# Altium PCB PCB1.PcbDoc
Units mm, origin at the board's own origin, x right, y up, seen from the top; angles counter-clockwise.
Board outline 48.75 x 42.5 mm, 2 copper layers (Top Layer, Bottom Layer), stack 0.325 mm thick; 24 components, 30 nets, 95 pads, 14 vias.
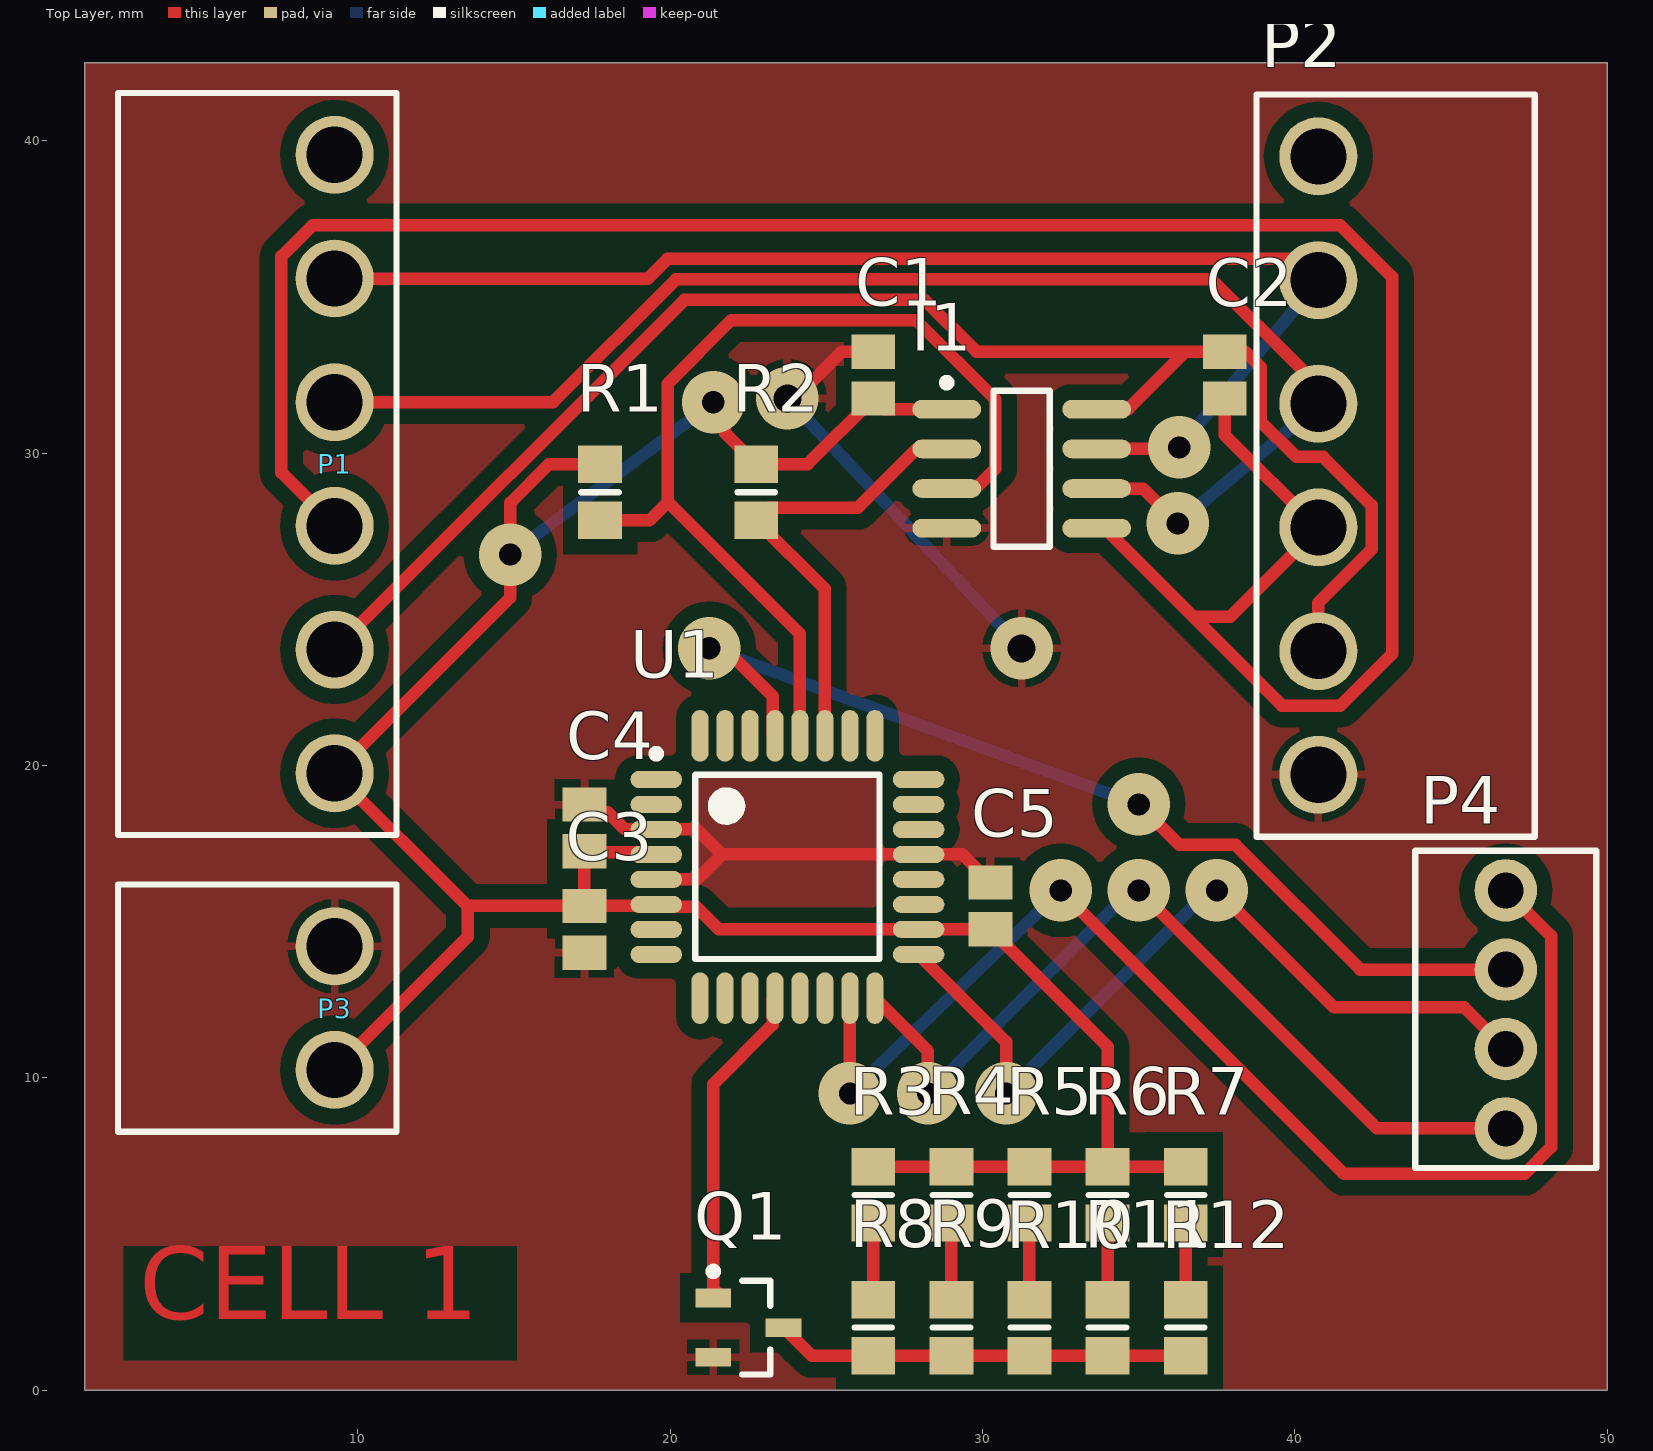
[diagram p0: Top Layer view]
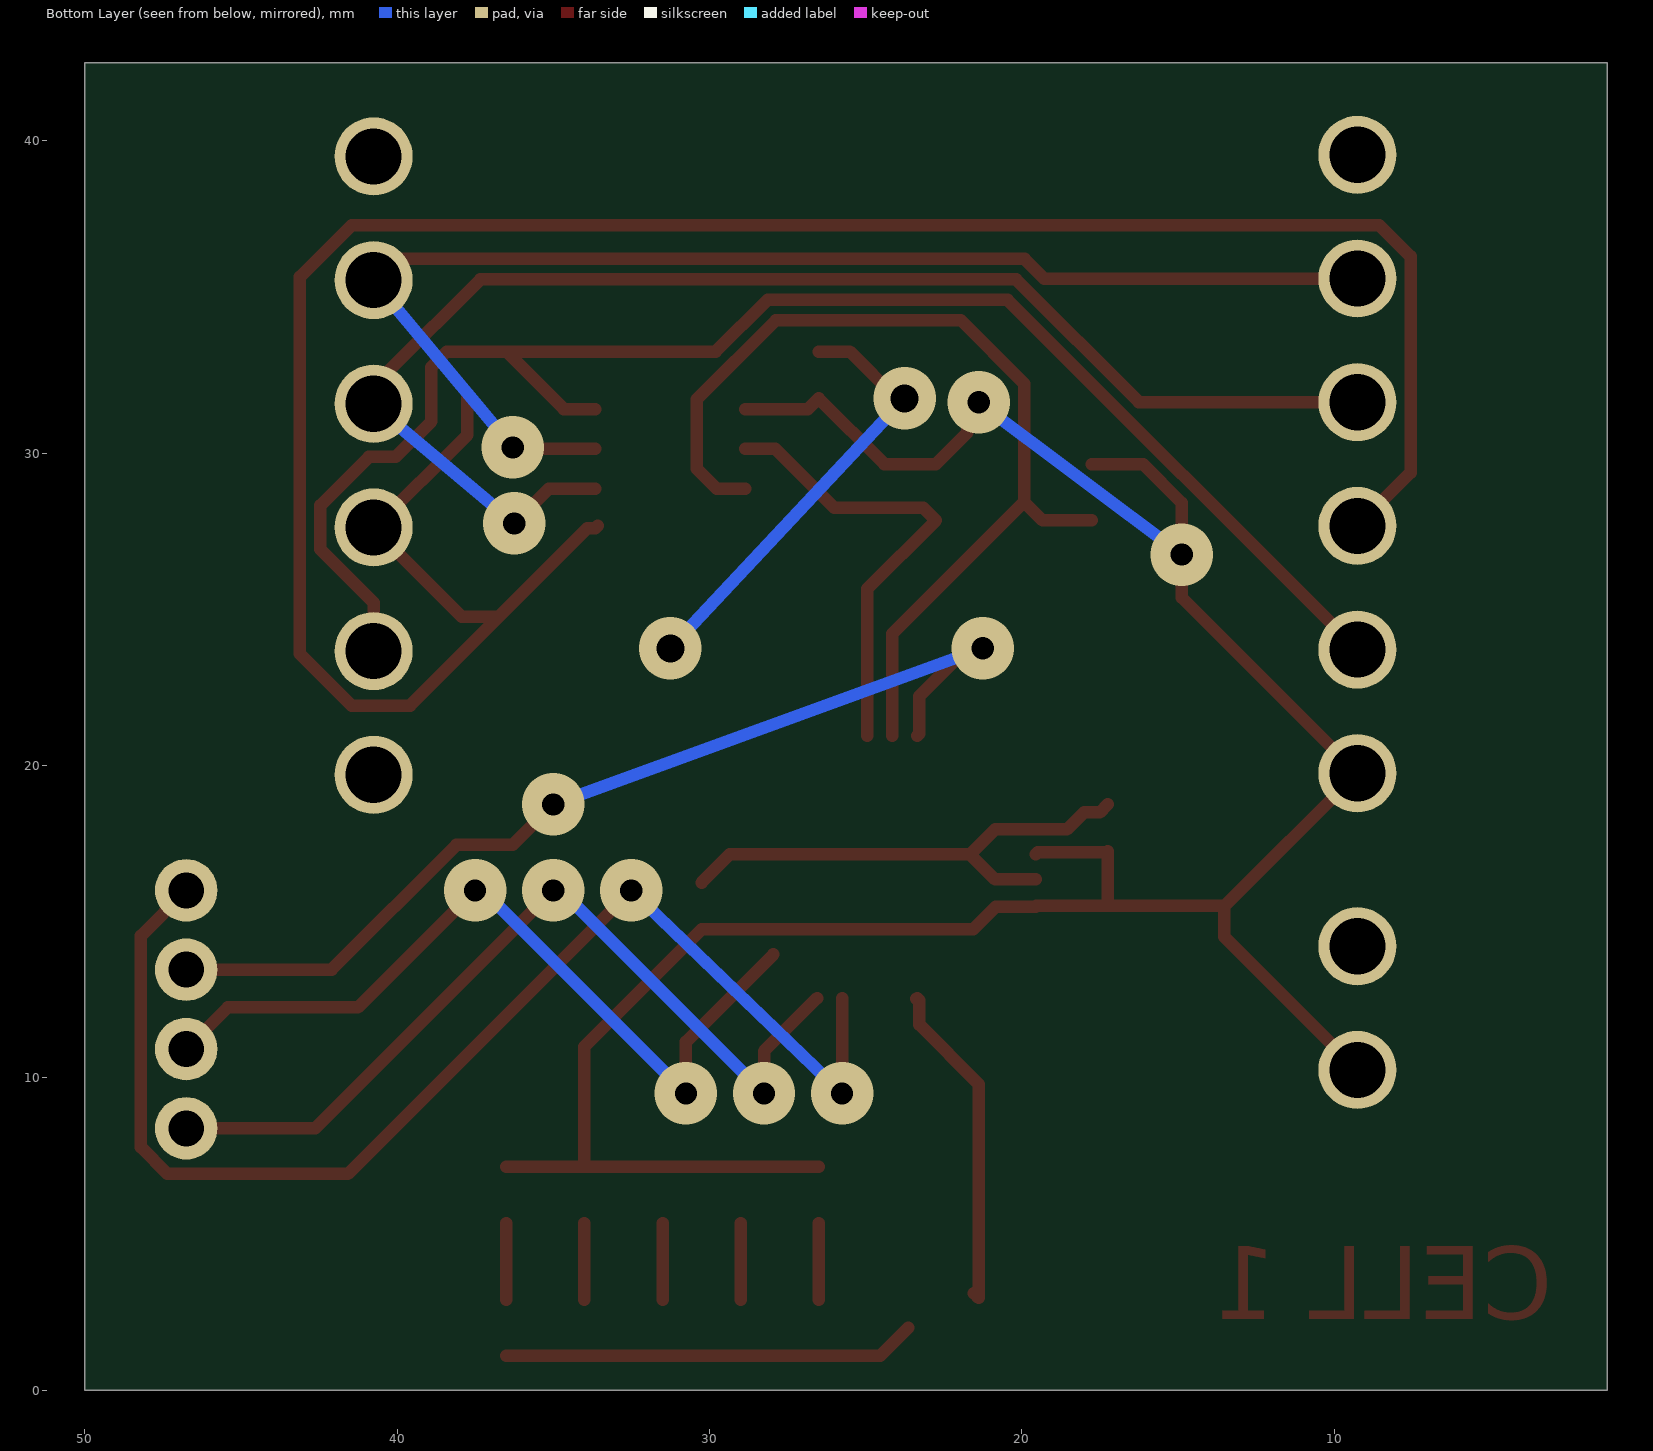
[diagram p1: Bottom Layer view, seen from below]

## Layer stack, top to bottom
Top Layer: signal copper 0.0356
Dielectric 1: core 0.254, FR-4, Dk 4.2
Bottom Layer: signal copper 0.0356

## Board outline
1.25,0 50,0 50,42.5 1.25,42.5

## Design rules (kind name [scope] priority, off if disabled: settings)
Clearance [All] p1: gap=0.25
PolygonConnect [All] p1: connectstyle=Relief reliefconductorwidth=0.254 reliefentries=4 polygonreliefangle="90 Angle" airgapwidth=0.254
RoutingVias [All] p1: holewidth=0.711 width=2 viastyle="Through Hole" minholewidth=0.711 minwidth=2 maxholewidth=0.711 maxwidth=2.5
SolderMaskExpansion [All] p1: expansion=0.102
Width [All] p1: maxlimit=0.4 minlimit=0.4 preferedwidth=0.4
30 further rules are at their usual default settings.

## Classes and differential pairs
component class Sheet2: P8

## Components (designator, comment, footprint, x,y, rotation, side; value= is the part's Value field where it differs from the comment)
C1 "Cap" C0805 26.5,32.5 r90 top
C2 "Cap" C0805 37.75,32.5 r270 top
C3 "Cap" C0805 17.25,14.75 r270 top
C4 "Cap" C0805 17.25,18 r90 top
C5 "Cap" C0805 30.25,15.5 r90 top
I1 "ADUM1250ARZ" SO8_N 31.25,29.5 r0 top
P1 "NS39-W6K" NS39-W6K 9.25,19.75 r90 top
P2 "NS39-W6K" NS39-W6K 40.75,39.5 r270 top
P3 "NS39-W2K" NS39-W2k 9.25,10.25 r90 top
P4 "WF/04S-M" WF/04S-M 46.75,16 r270 top
Q1 "2N7002" SOT-23_N 22.5,2 r0 top
R1 "Res" 6-0805_N 17.75,28.75 r90 top
R2 "Res" 6-0805_N 22.75,28.75 r90 top
R3 "Res" 6-0805_N 26.5,6.25 r90 top
R4 "Res" 6-0805_N 29,6.25 r90 top
R5 "Res" 6-0805_N 31.5,6.25 r90 top
R6 "Res" 6-0805_N 34,6.25 r90 top
R7 "Res" 6-0805_N 36.5,6.25 r90 top
R8 "Res" 6-0805_N 26.5,2 r90 top
R9 "Res" 6-0805_N 29,2 r90 top
R10 "Res" 6-0805_N 31.5,2 r90 top
R11 "Res" 6-0805_N 34,2 r90 top
R12 "Res" 6-0805_N 36.5,2 r90 top
U1 "ATmega328P-AU" 32A_N 23.75,16.75 r0 top

## Footprints (in the part's own frame and the unit in brackets; to place one, negate y for a bottom-side part, rotate by r counter-clockwise, add the part's x,y. Pads: shape width x height; smd on the part's side, far side on the other; paste and mask are expansions set on the pad)
6-0805_N [mm] "Chip Resistor, Body 2.0x1.2mm, IPC Medium Density"
  rect 1.2x1.4 smd: 1(-0.9,0) 2(0.9,0)
  silkscreen extent 0,-0.6 0,0.6, body extent -1.07,-0.7 1.07,0.7, height 0.7
32A_N [mm] "Thin QFP, 32-Leads, Body 7x7mm, Pitch 0.8mm, IPC Medium Density"
  oval 1.65x0.55 smd: 1(-4.2,2.8) 2(-4.2,2) 3(-4.2,1.2) 4(-4.2,0.4) 5(-4.2,-0.4) 6(-4.2,-1.2) 7(-4.2,-2) 8(-4.2,-2.8) 17(4.2,-2.8) 18(4.2,-2) 19(4.2,-1.2) 20(4.2,-0.4) 21(4.2,0.4) 22(4.2,1.2) 23(4.2,2) 24(4.2,2.8)
  oval 0.55x1.65 smd: 9(-2.8,-4.2) 10(-2,-4.2) 11(-1.2,-4.2) 12(-0.4,-4.2) 13(0.4,-4.2) 14(1.2,-4.2) 15(2,-4.2) 16(2.8,-4.2) 25(2.8,4.2) 26(2,4.2) 27(1.2,4.2) 28(0.4,4.2) 29(-0.4,4.2) 30(-1.2,4.2) 31(-2,4.2) 32(-2.8,4.2)
  silkscreen extent -4.32,-2.95 2.95,3.75, body extent -3.5,-3.5 3.5,3.5, height 1.2
C0805 [mm] "Chip Capacitor, Body 2.0x1.3mm, IPC High Density"
  rect 1.1x1.4 smd: 1(-0.75,0) 2(0.75,0)
  body extent -1.1,-0.72 1.1,0.72, height 1.4
NS39-W2k [mm]
  round 2.5 hole 1.8: 1(0,0) 2(3.96,0)
  silkscreen extent -1.98,-1.98 5.94,6.93, body extent -1.98,-0.5 5.94,18.87, height 9.6
NS39-W6K [mm]
  round 2.5 hole 1.8: 1(0,0) 2(3.96,0) 3(7.92,0) 4(11.88,0) 5(15.84,0) 6(19.8,0)
  silkscreen extent -1.98,-1.98 21.78,6.93, body extent -1.98,-0.5 21.78,18.87, height 9.6
SO8_N [mm] "SOIC, 8-Leads, Body 4.9x3.9mm, Pitch 1.27mm, IPC Medium Density"
  oval 2.2x0.6 smd: 1(-2.4,1.905) 2(-2.4,0.635) 3(-2.4,-0.635) 4(-2.4,-1.905) 5(2.4,-1.905) 6(2.4,-0.635) 7(2.4,0.635) 8(2.4,1.905)
  silkscreen extent -2.52,-2.5 0.9,2.88, body extent -2,-2.5 2,2.5, height 1.75
SOT-23_N [mm] "SOT23, 3-Leads, Body 2.9x1.3mm, Pitch 0.95mm, Lead Span 2.5mm, IPC Medium Density"
  rect 1.15x0.6 smd: 1(-1.125,0.95) 2(-1.125,-0.95) 3(1.125,0)
  silkscreen extent -1.25,-1.5 0.7,1.92, body extent -0.7,-1.5 0.7,1.5, height 1.1
WF/04S-M [mm]
  round 2 hole 1.15: 1(0,0) 2(2.54,0) 3(5.08,0) 4(7.62,0)
  silkscreen extent -1.27,-2.9 8.89,2.9, body extent -1.27,-2.92 8.89,2.88, height 12.12

## Part data
C1 C2 C3 C4 C5: "Capacitor"
I1: library part ADUM1250, "Hot Swappable, Dual I2C Isolator"
P1 P2 P3 P4: "Socket"
Q1: library part MOSFET-N, "N-Channel MOSFET"
R1 R2 R3 R4 R5 R6 R7 R8 R9 R10 R11 R12: library part Res2, "Resistor"
U1: "8-bit AVR Microcontroller, 32KB Flash, 1KB EEPROM, 2KB SRAM, 32-pin TQFP, Industrial Grade (-40°C to 85°C)"

## Via types
v1: diameter 2, hole 0.711, Top Layer to Bottom Layer, 12 vias
v2: diameter 2, hole 0.9, Top Layer to Bottom Layer, 2 vias

## Nets (pads, with @x,y where several pads share a name; then routed paths per layer and width w, separated by ;. In a path a pad name is that pad's centre, name@x,y a point inside that pad or via, vN(x,y) a via of type N, cw(c..) or ccw(c..) an arc to the next point about the centre after c; other vN are vias at no path point)
GND: C1.2 C3.2 C4.2 C5.2 I1.4 P2.6 P3.2 Q1.2 U1.3 U1.5 U1.21 | length 30.8
  Top Layer w0.4: C4.2 17.5,18.5 18,18.5 18.55,17.95 U1.3 20.85,17.95 21.65,17.15 ; U1.5 20.85,16.35 21.65,17.15 ; v2(23.75,31.75) 24,31.75 25.5,33.25 C1.2 ; C5.2 29.35,17.15 U1.21 21.65,17.15
  Bottom Layer w0.4: v2(23.75,31.75) v2(31.25,23.75)
GND_5V: C2.2 I1.5 P1.3 P2.4 | length 81.2
  Top Layer w0.4: P1.3 7.546,29.374 7.546,36.296 8.544,37.294 41.456,37.294 43.108,35.642 43.108,23.568 41.456,21.916 39.584,21.916 36.745,24.756 ; I1.5@33.575,27.67 I1.5 33.905,27.595 36.745,24.756 ; C2.2 37.75,30.58 P2.4@40.735,27.595 ; P2.4@40.75,27.58 37.925,24.756 36.745,24.756
GND_24V: 
GND_B: 
NetC6_1: 
NetC8_1: 
NetC10_1: 
NetC11_1: 
NetI1_2: I1.2 R2.1 U1.27 | length 14.9
  Top Layer w0.4: U1.27 24.95,25.65 R2.1 23.15,28.25 26,28.25 27.885,30.135 I1.2
NetI1_3: I1.3 R1.1 U1.28 | length 31.9
  Top Layer w0.4: R1.1 19.333,27.85 19.921,28.438 ; U1.28 24.15,24.21 19.921,28.438 ; I1.3 29.769,28.865 30.404,29.5 30.404,31.717 27.867,34.254 21.948,34.254 19.921,32.228 19.921,28.438
NetI1_6: I1.6 P1.4 P2.3 | length 44.3
  Top Layer w0.4: P1.4 16.245,31.63 20.177,35.562 37.33,35.562 40.25,32.642 40.25,31.63 40.66,31.63 P2.3@40.75,31.54 ; I1.6 35.135,28.865 v1(36.25,27.75)
  Bottom Layer w0.4: v1(36.25,27.75) P2.3@40.75,31.54
NetI1_7: I1.7 P1.5 P2.2 | length 41.7
  Top Layer w0.4: P1.5 19.28,35.59 19.906,36.216 40.034,36.216 P2.2@40.75,35.5 ; I1.7 36.25,30.135 v1(36.296,30.181)
  Bottom Layer w0.4: v1(36.296,30.181) P2.2@40.75,35.5
NetJ1_3: 
NetP4_1: P4.1 U1.15 | length 41.5
  Top Layer w0.4: v1(25.75,9.5) U1.15 ; v1@32.944,16 v1(32.5,16) 41.574,6.926 47.352,6.926 48.204,7.778 48.204,14.546 P4.1
  Bottom Layer w0.4: v1(25.75,9.5) v1(32.5,16)
NetP4_2: P4.2 U1.29 | length 32.5
  Top Layer w0.4: v1(21.25,23.75) 21.75,23.75 23.279,22.221 23.279,21.021 U1.29 ; v1(35,18.75) 36.296,17.454 38.102,17.454 42.096,13.46 P4.2
  Bottom Layer w0.4: v1(21.25,23.75) v1(35,18.75)
NetP4_3: P4.3 U1.17 | length 26.4
  Top Layer w0.4: U1.17 30.75,11.15 v1(30.75,9.5) ; v1(37.5,16) 41.25,12.25 45.42,12.25 P4.3
  Bottom Layer w0.4: v1(30.75,9.5) 37.25,16 v1(37.5,16)
NetP4_4: P4.4 U1.16 | length 28.1
  Top Layer w0.4: U1.16 28.25,10.85 v1(28.25,9.5) ; v1(35,16) 42.62,8.38 P4.4
  Bottom Layer w0.4: v1(28.25,9.5) 34.75,16 v1(35,16)
NetP8_3: 
NetP8_4: 
NetQ1_1: Q1.1 U1.12 | length 10.7
  Top Layer w0.4: Q1.1@21.529,3.104 Q1.1 21.375,9.794 23.279,11.698 23.279,12.479 U1.12 U1.12@23.375,12.525
NetQ1_3: Q1.3 R8.1 R9.1 R10.1 R11.1 R12.1 | length 13.2
  Top Layer w0.4: Q1.3 24.525,1.1 R8.1 R9.1 R10.1 R11.1 R12.1
NetR3_1: R3.1 R8.2 | length 2.5
  Top Layer w0.4: R8.2 R3.1
NetR4_1: R4.1 R9.2 | length 2.5
  Top Layer w0.4: R9.2 R4.1
NetR5_1: R5.1 R10.2 | length 2.5
  Top Layer w0.4: R10.2 R5.1
NetR6_1: R6.1 R11.2 | length 2.5
  Top Layer w0.4: R11.2 R6.1
NetR7_1: R7.1 R12.2 | length 2.5
  Top Layer w0.4: R12.2 R7.1
VCC: C1.1 C3.1 C4.1 C5.1 I1.1 P1.1 P3.1 R1.2 R2.2 R3.2 R4.2 R5.2 R6.2 R7.2 U1.4 U1.6 U1.18 | length 85.5
  Top Layer w0.4: P3.1 13.521,14.521 13.521,15.479 ; R1.2 16.115,29.65 14.875,28.41 v1(14.875,26.75) 14.875,25.375 P1.1 13.521,15.479 ; U1.4 19.479,17.221 17.279,17.221 C4.1 C3.1 ; v1(21.375,31.625) 21.75,31.25 21.75,30.65 R2.2 24.4,29.65 C1.1 26.845,31.405 I1.1 ; R3.2 R4.2 R5.2 R6.2 ; R7.2 R6.2 ; 13.521,15.479 13.521,15.5 C3.1 ; C3.1 19.529,15.5 19.55,15.479 20.829,15.479 21.558,14.75 U1.18 C5.1 34,11 R6.2
  Bottom Layer w0.4: v1(14.875,26.75) v1(21.375,31.625)
VCC_5V: C2.1 I1.8 P1.2 P2.5 | length 50.6
  Top Layer w0.4: P1.2 20.448,34.908 28.138,34.908 29.796,33.25 36.5,33.25 ; I1.8 34.655,31.405 36.5,33.25 ; P2.5 40.75,25.21 42.454,26.914 42.454,28.326 40.904,29.876 40.044,29.876 38.904,31.016 38.904,32.754 38.408,33.25 C2.1 36.5,33.25
VCC_24V: 
VCC_B: 
pads on no net: P1.6 P2.1 U1.1 U1.2 U1.7 U1.8 U1.9 U1.10 U1.11 U1.13 U1.14 U1.19 U1.20 U1.22 U1.23 U1.24 U1.25 U1.26 U1.30 U1.31 U1.32

## Polygon pours and split planes (outlines as drawn)
GND on Top Layer "GND" (solid, remove dead copper, pour order 38): 1.25,42.5 50,42.5 50,0 1.25,0 1.25,42.5

## Other copper
Top Layer:
  text "CELL 1" at 3,1.5 h4